# Altium PCB PCB1.PcbDoc
Units mil, origin at the board's own origin, x right, y up, seen from the top; angles counter-clockwise.
Board outline 3400 x 3300 mil, 2 copper layers (Top Layer, Bottom Layer); 26 components, 22 nets, 88 pads, 3 vias.
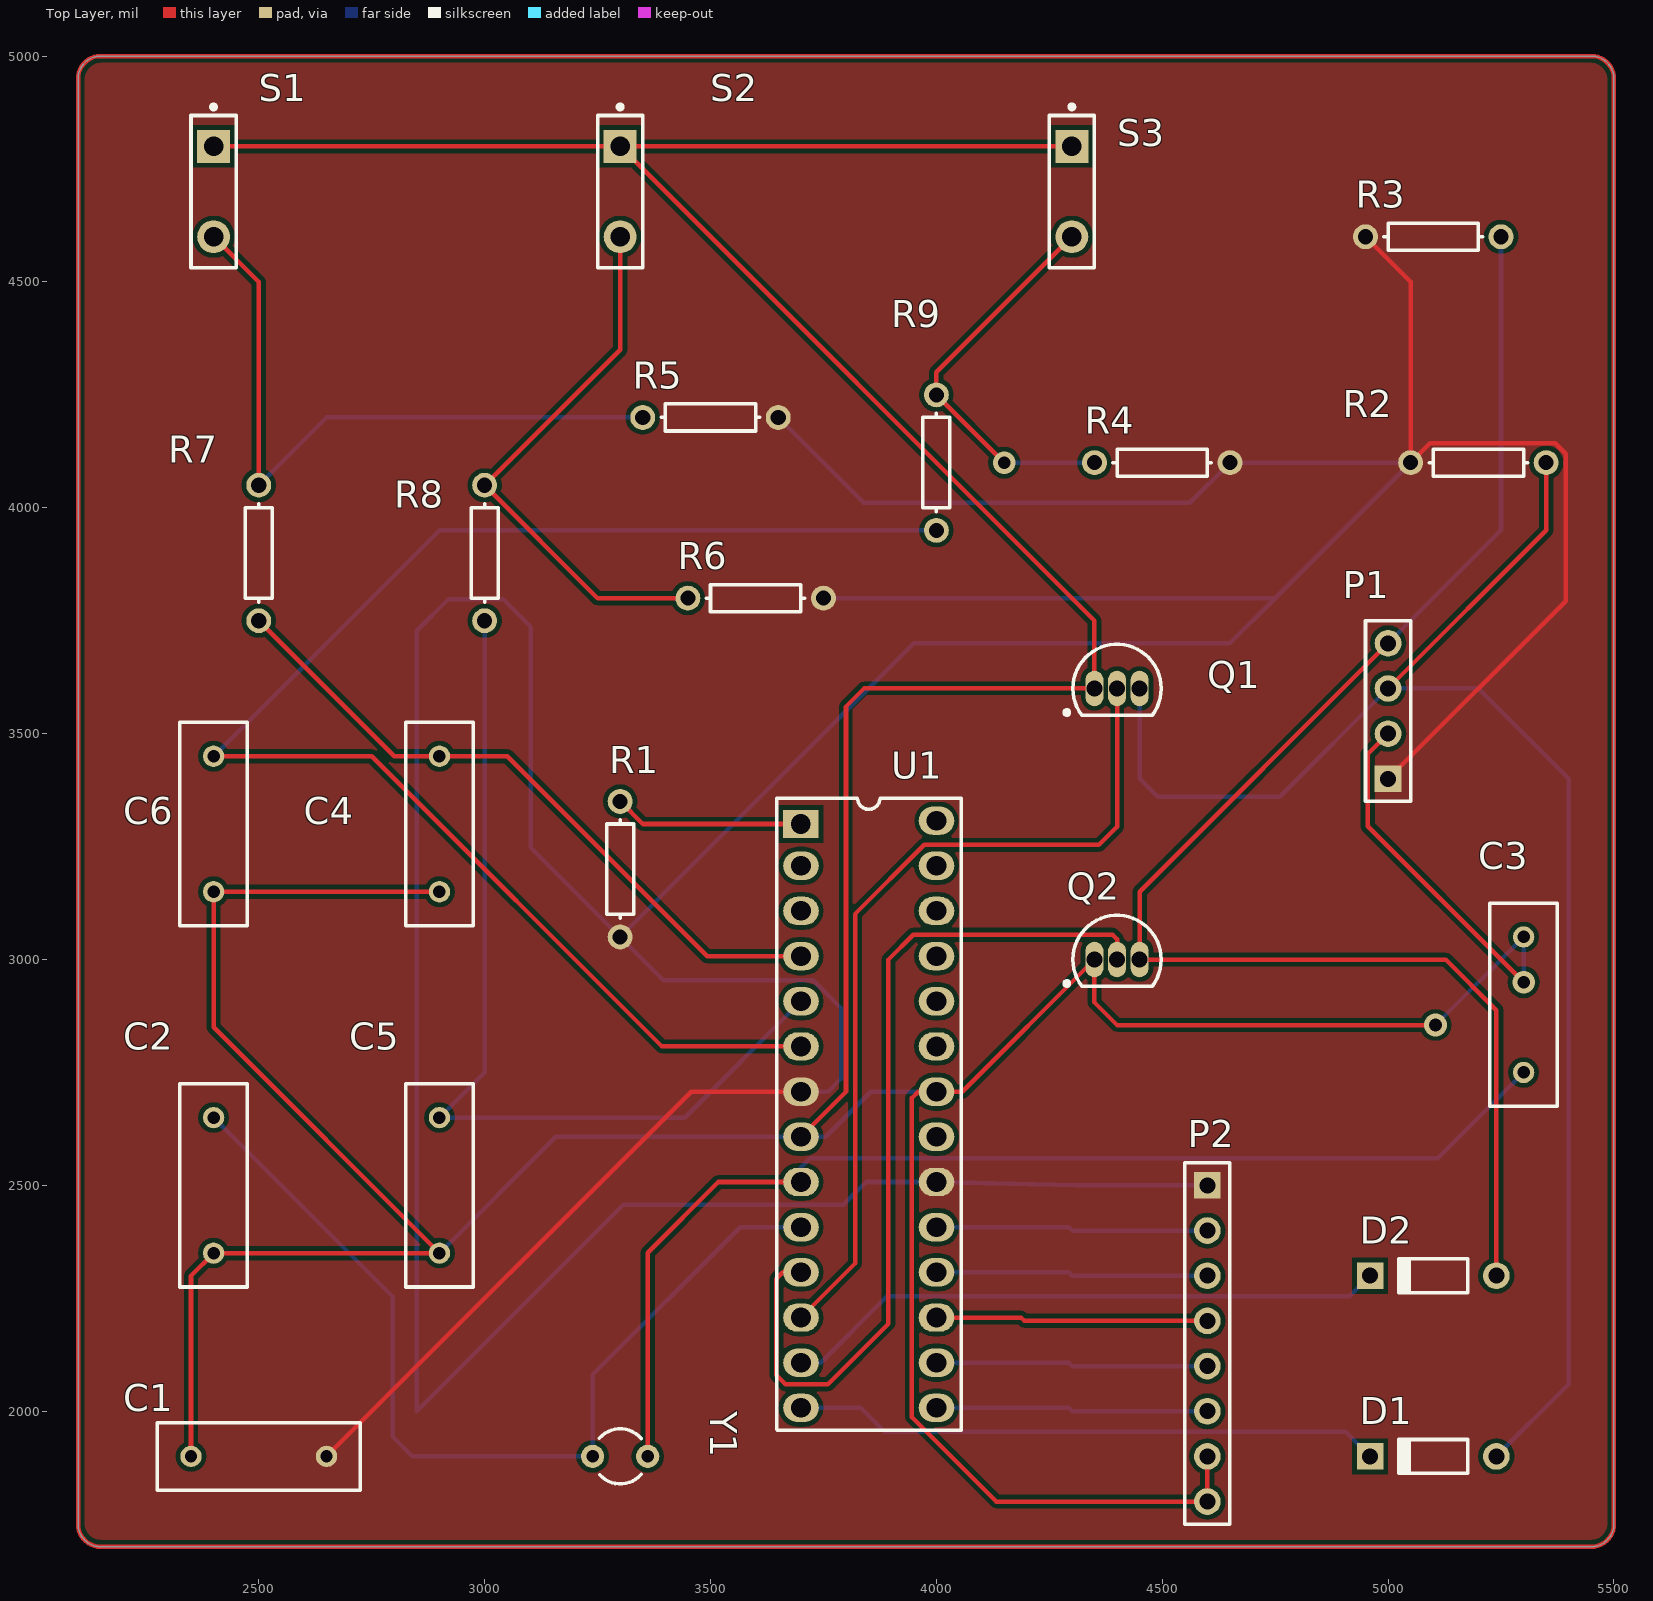
[diagram p0: Top Layer view]
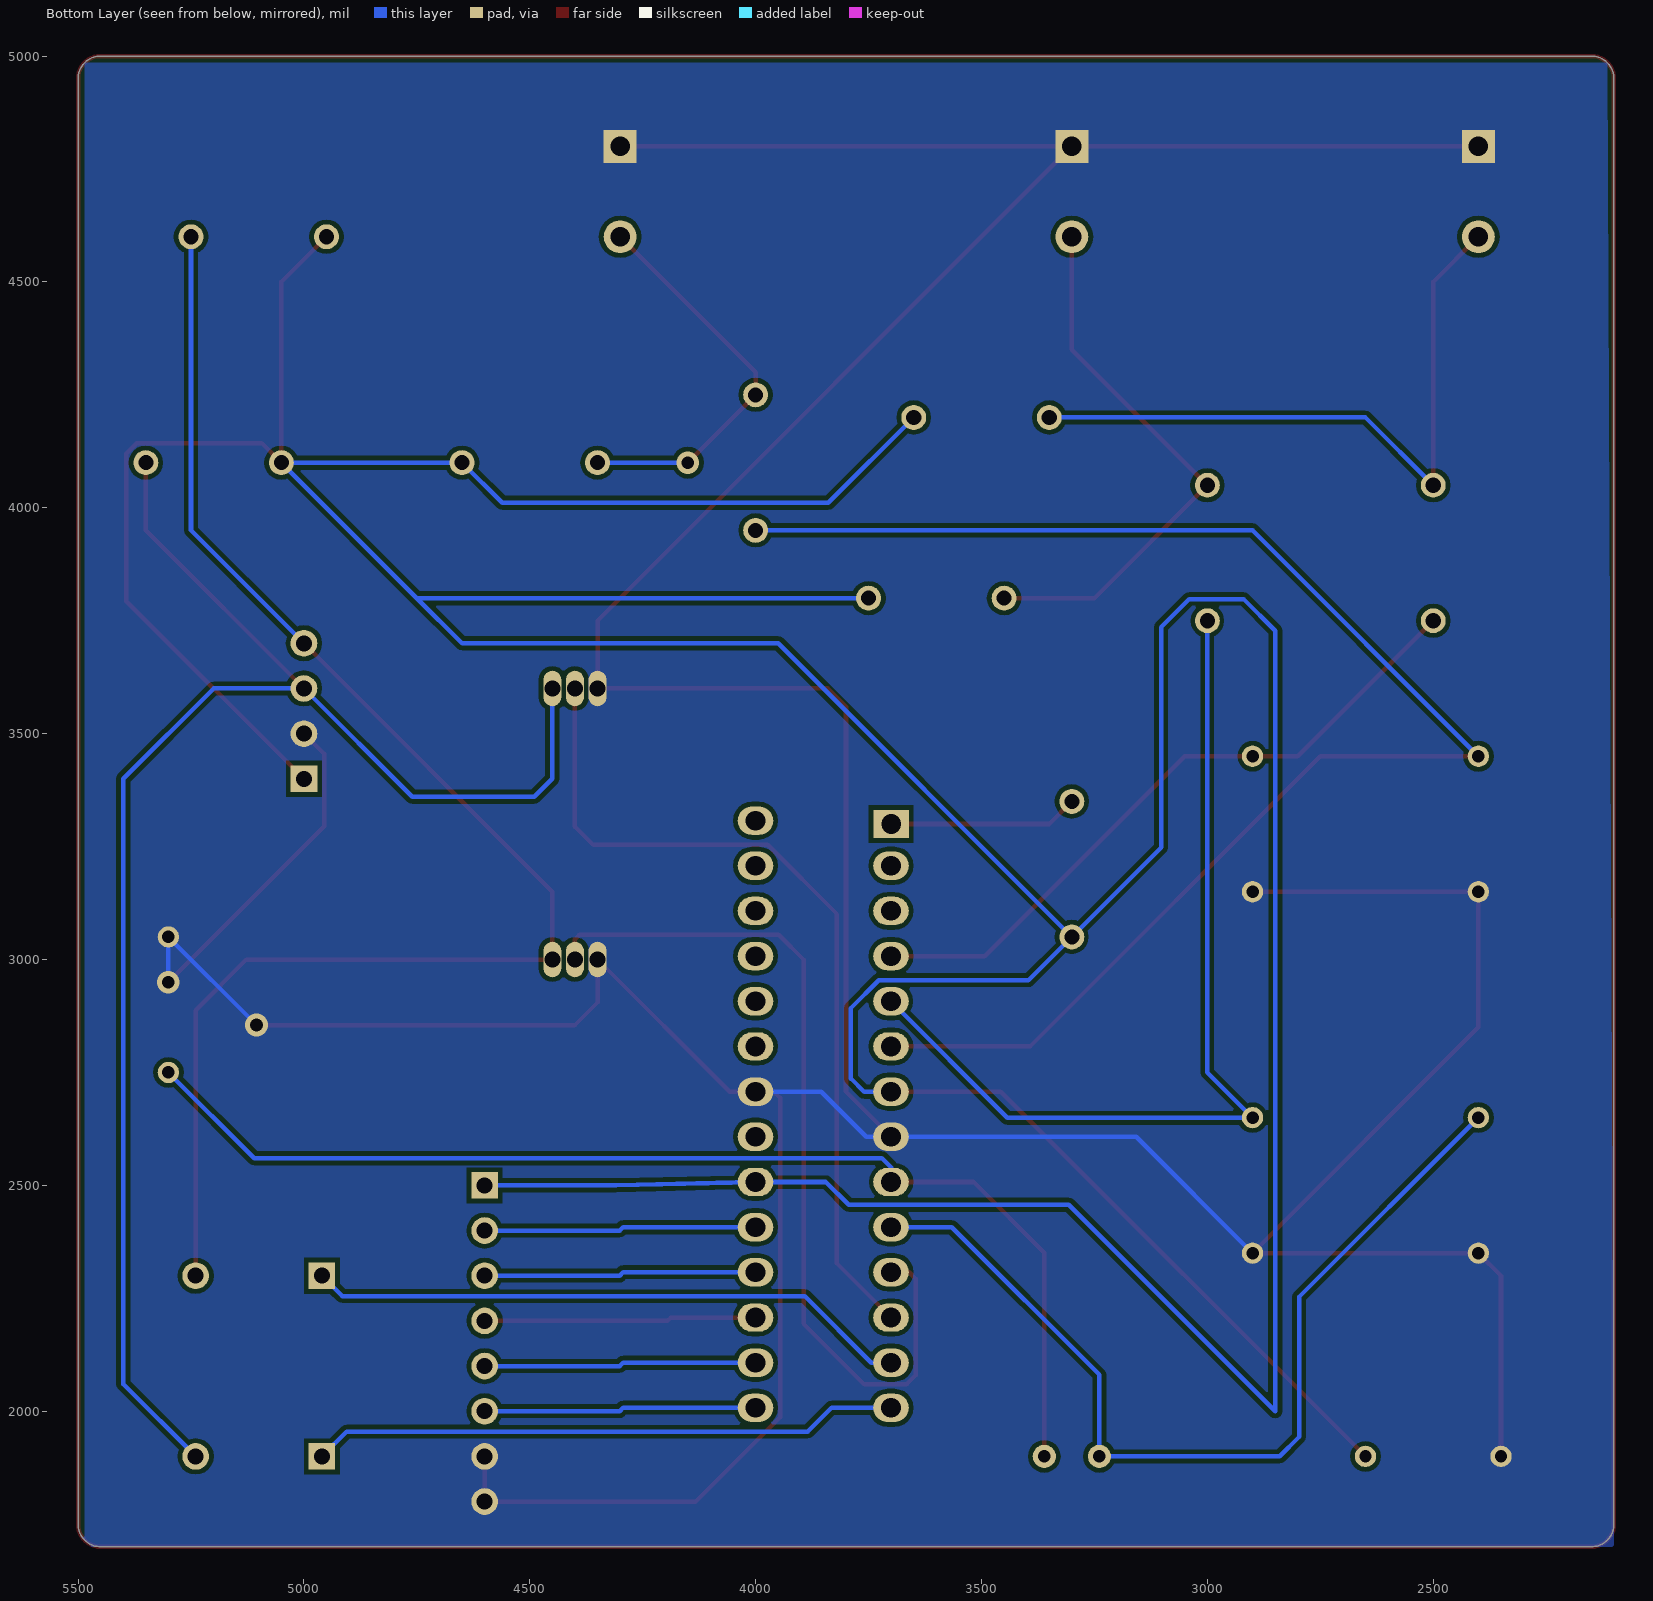
[diagram p1: Bottom Layer view, seen from below]

## Layer stack, top to bottom
Top Solder: solder mask 0.4, Solder Resist, Dk 3.5
Top Layer: signal copper 1.4
Dielectric 1: dielectric 12.6, FR-4, Dk 4.8
Bottom Layer: signal copper 1.4
Bottom Solder: solder mask 0.4, Solder Resist, Dk 3.5

## Board outline
2100,1750 2100,4950 cw(c2150,4950) 2150,5000 5450,5000 cw(c5450,4950) 5500,4950 5500,1750 cw(c5450,1750) 5450,1700 2150,1700 cw(c2150,1750)

## Design rules (kind name [scope] priority, off if disabled: settings)
Clearance Clearance_1 [All] p1: gap=10
Clearance [All] p2: gap=10
MinimumSolderMaskSliver [All] p1 off: minsoldermaskwidth=10
PlaneConnect [All] p1: planeconnectstyle=Direct reliefexpansion=20 reliefentries=4 reliefconductorwidth=10 reliefairgap=10
PolygonConnect [All] p1: connectstyle=Direct reliefconductorwidth=10 reliefentries=4 polygonreliefangle="90 Angle" airgapwidth=10
RoutingVias [All] p1: holewidth=28 width=50 viastyle="Through Hole" minholewidth=28 minwidth=50 maxholewidth=28 maxwidth=50
SilkToBoardRegionClearance [All] p1 off:
SilkToSilkClearance [All] p1 off: silktosilkclearance=10
SilkToSolderMaskClearance [IsPad] p1 off: minsilkscreentomaskgap=10 clearancetoexposedcopper=TRUE
SolderMaskExpansion [All] p1: expansion=4
Width [All] p1: maxlimit=10 minlimit=10 preferedwidth=10
25 further rules are at their usual default settings.

## Components (designator, comment, footprint, x,y, rotation, side; value= is the part's Value field where it differs from the comment)
C1 "Cap" RAD-0.3 2500,1900 r180 top
C2 "Cap" RAD-0.3 2400,2500 r90 top
C3 "Cap" RAD-0.3 5300,2900 r90 top
C4 "Cap" RAD-0.3 2900,3300 r90 top
C5 "Cap" RAD-0.3 2900,2500 r90 top
C6 "Cap" RAD-0.3 2400,3300 r90 top
D1 "Diode 1N914" DO-35 5100,1900 r180 top
D2 "Diode 1N914" DO-35 5100,2300 r180 top
P1 "Header 4" HDR1X4 5000,3400 r90 top
P2 "Header 8" HDR1X8 4600,2500 r270 top
Q1 "2N3904" TO-92A 4400,3600 r270 top
Q2 "2N3904" TO-92A 4400,3000 r270 top
R1 "Res1" AXIAL-0.3 3300,3200 r270 top
R2 "Res1" AXIAL-0.3 5200,4100 r180 top
R3 "Res1" AXIAL-0.3 5100,4600 r180 top
R4 "Res1" AXIAL-0.3 4500,4100 r0 top
R5 "Res1" AXIAL-0.3 3500,4200 r0 top
R6 "Res1" AXIAL-0.3 3600,3800 r0 top
R7 "Res1" AXIAL-0.3 2500,3900 r270 top
R8 "Res1" AXIAL-0.3 3000,3900 r270 top
R9 "Res1" AXIAL-0.3 4000,4100 r270 top
S1 "SW-PB" SPST-2 2400,4700 r270 top
S2 "SW-PB" SPST-2 3300,4700 r270 top
S3 "SW-PB" SPST-2 4300,4700 r270 top
U1 "ATMEGA328P-PU" 27_DIP_7.62mm 3700,3300 r0 top
Y1 "XTAL" R38 3300,1900 r90 top

## Footprints (in the part's own frame and the unit in brackets; to place one, negate y for a bottom-side part, rotate by r counter-clockwise, add the part's x,y. Pads: shape width x height; smd on the part's side, far side on the other; paste and mask are expansions set on the pad)
27_DIP_7.62mm [mm]
  rect 2x1.6 hole 1.1: 1(0,0)
  oval 2x1.6 hole 1.1: 2(0.01,-2.35) 3(0.01,-4.89) 4(0.01,-7.43) 5(0.01,-9.97) 6(0.01,-12.51) 7(0.01,-15.05) 8(0.01,-17.59) 9(0.01,-20.13) 10(0.01,-22.67) 11(0.01,-25.21) 12(0.01,-27.75) 13(0.01,-30.29) 14(0.01,-32.83) 15(7.63,-32.83) 16(7.63,-30.29) 17(7.63,-27.75) 18(7.63,-25.21) 19(7.63,-22.67) 20(7.63,-20.13) 21(7.63,-17.59) 22(7.63,-15.05) 23(7.63,-12.51) 24(7.63,-9.97) 25(7.63,-7.43) 26(7.63,-4.89) 27(7.63,-2.35) 28(7.63,0.19)
  silkscreen extent -1.35,-34.1 9.02,1.46, body extent -0.23,-34.26 7.65,1.68, height 4.65
AXIAL-0.3 [mm] "Axial Device, Thru-Hole; 2 Leads; 0.3 in Pin Spacing"
  round 1.4 hole 0.85: 1(-3.81,0) 2(3.81,0)
  silkscreen extent -2.77,-0.76 2.77,0.76
DO-35 [mm] "Diode, Axial; Body 3.8 x 1.9 mm (LxDia. max), Lead Dia. 0.53 mm (max)"
  round 1.5 hole 0.9: 1(-3.55,0)
  rect 1.5x1.5 hole 0.9: 2(3.55,0)
  silkscreen extent -1.95,-0.95 2.05,0.95
HDR1X4 [mm] "Connector; Header; 4 Position"
  rect 1.5x1.5 hole 0.9: 1(0,0)
  round 1.5 hole 0.9: 2(2.54,0) 3(5.08,0) 4(7.62,0)
  silkscreen extent -1.27,-1.27 8.89,1.27
HDR1X8 [mm] "Connector; Header; 8 Position"
  rect 1.5x1.5 hole 0.9: 1(0,0)
  round 1.5 hole 0.9: 2(2.54,0) 3(5.08,0) 4(7.62,0) 5(10.16,0) 6(12.7,0) 7(15.24,0) 8(17.78,0)
  silkscreen extent -1.27,-1.27 19.05,1.27
R38 [mm] "Crystal, Thru-Hole; 2 Leads; Body 3.1 x 8.2 mm (Dia.xH)"
  round 1.3 hole 0.7: 1(0,1.55) 2(0,-1.55)
  silkscreen extent -1.55,-1.19 1.55,1.17
RAD-0.3 [mm] "Radial Cap, Thru-Hole; 2 Leads; 0.3 in Pin Spacing"
  round 1.2 hole 0.7: 1(-3.81,0) 2(3.81,0)
  silkscreen extent -5.71,-1.91 5.71,1.91
SPST-2 [mm] "Switch; 2 Leads"
  rect 1.85x1.85 hole 1.1: 1(-2.54,0)
  round 1.85 hole 1.1: 2(2.54,0)
  silkscreen extent -4.89,-1.27 4.28,1.27
TO-92A [mm] "TO, Flat Index; 3 In-Line, Axial Leads; Body Dia. 4.5mm; Leads 0.51 x 0.48 mm (max)"
  oval 2x1 hole 0.9: 1(0,-1.27) 2(0,0) 3(0,1.27)
  silkscreen extent -2.48,-2.95 1.5,2.48, body extent -2.5,-2.5 1.5,2.5, height 6.86

## Part data
C1 C2 C3 C4 C5 C6: "Capacitor"
D1 D2: "High Conductance Fast Diode"
P1: "Header, 4-Pin"
P2: "Header, 8-Pin"
Q1 Q2: "NPN General Purpose Amplifier"
R1 R2 R3 R4 R5 R6 R7 R8 R9: "Resistor"
S1 S2 S3: "Switch"
U1: "ATMEGA328P-PU; 8 bit Microcontroller AVR 20MHz 1; 32kb Flash; 2kb RAM; I2C SPI 2"
Y1: "Crystal Oscillator"

## Via types
v1: diameter 50, hole 28, Top Layer to Bottom Layer, 3 vias

## Nets (pads, with @x,y where several pads share a name; then routed paths per layer and width w, separated by ;. In a path a pad name is that pad's centre, name@x,y a point inside that pad or via, vN(x,y) a via of type N, cw(c..) or ccw(c..) an arc to the next point about the centre after c; other vN are vias at no path point)
GND: C1.2 C2.1 C3.2 C4.1 C5.1 C6.1 P1.2 P2.7 P2.8 Q1.1 Q2.1 S1.1 S2.1 S3.1 U1.8 U1.22 | length 12848.5
  Top Layer w10: C1.2 2350,2300 C2.1 C5.1 2400,2850 C6.1 C4.1 ; S1.1 S2.1 ; U1.8 3800,2707.09 3800,3560 3840,3600 Q1.1 4350,3750 S2.1 ; S3.1 S2.1 ; P2.7 P2.8 4133,1800 3946,1987 3946,2693.48 3960,2707.48 U1.22 4057.48,2707.48 Q2.1 4350,2905 4400,2855 v1(5105,2855) ; P1.2 4955,3455 4955,3295 v1(5300,2950)
  Bottom Layer w10: C5.1 3157.48,2607.48 U1.8 3755,2607.48 3855,2707.48 U1.22 ; v1(5105,2855) C3.2 v1(5300,2950)
MISO: P2.3 U1.18 | length 602.7
  Bottom Layer w10: U1.18 4293.52,2307.48 4301,2300 P2.3
MOSI: P2.4 U1.17 | length 602.7
  Top Layer w10: U1.17 4187.52,2207.48 4195,2200 P2.4
MOTION: P2.6 U1.15 | length 602.7
  Bottom Layer w10: U1.15 4293.52,2007.48 4301,2000 P2.6
NetC2_2: C2.2 U1.10 Y1.1 | length 2108.6
  Bottom Layer w10: C2.2 2797,2253 2797,1943 2840,1900 Y1.1 3238.98,2080.46 3566,2407.48 U1.10
NetC3_1: C3.1 U1.9 Y1.2 | length 2574.3
  Top Layer w10: Y1.2 3361.02,2351.02 3517.48,2507.48 U1.9
  Bottom Layer w10: U1.9 3700.39,2540 3720.39,2560 5110,2560 C3.1
NetC4_2: C4.2 R7.2 U1.4 | length 1508
  Top Layer w10: R7.2 2800,3450 C4.2 3050,3450 3492.52,3007.48 U1.4
NetC5_2: C5.2 R8.2 U1.5 | length 2048.5
  Bottom Layer w10: R8.2 3000,2750 C5.2 3442.91,2650 U1.5
NetC6_2: C6.2 R9.2 U1.6 | length 3373.6
  Top Layer w10: C6.2 2750,3450 3392.52,2807.48 U1.6
  Bottom Layer w10: C6.2 2900,3950 R9.2
NetD1_1: D1.1 P1.3 Q1.3 R2.1 | length 3560.2
  Top Layer w10: P1.3 5350,3950 R2.1
  Bottom Layer w10: Q1.3 4450,3400 4490,3360 4760,3360 P1.3 5200,3600 5400,3400 5400,2060.24 D1.1
NetD1_2: D1.2 U1.14 | length 1304.4
  Bottom Layer w10: U1.14 3832,2007.48 3884.48,1955 4905.24,1955 D1.2
NetD2_1: D2.1 P1.4 Q2.3 R3.1 | length 3355.5
  Top Layer w10: P1.4 4450,3150 Q2.3 5127.76,3000 5239.76,2888 D2.1
  Bottom Layer w10: P1.4 5250,3950 R3.1
NetD2_2: D2.2 U1.13 | length 1339.6
  Bottom Layer w10: U1.13 3744,2107.48 3891.52,2255 4915.24,2255 D2.2
NetQ1_2: Q1.2 U1.12 | length 1908.9
  Top Layer w10: U1.12 3820,2327.09 3820,3100.72 3973.26,3253.98 4360,3253.98 4400,3293.98 Q1.2
NetQ2_2: Q2.2 U1.11 | length 1969.4
  Top Layer w10: U1.11 3660,2307.48 3646,2293.48 3646,2080 3666,2060 3760,2060 3894,2194 3894,3000 3949,3055 4390,3055 4400,3045 Q2.2
NetR1_1: R1.1 U1.1 | length 420.7
  Top Layer w10: R1.1 3350,3300 U1.1
NetR4_1: R4.1 R9.1 S3.2 | length 886.4
  Top Layer w10: v1(4150,4100) R9.1 4000,4300 S3.2
  Bottom Layer w10: v1(4150,4100) R4.1
NetR5_1: R5.1 R7.1 S1.2 | length 1503.6
  Top Layer w10: S1.2 2500,4500 R7.1
  Bottom Layer w10: R7.1 2650,4200 R5.1
NetR6_1: R6.1 R8.1 S2.2 | length 1227.8
  Top Layer w10: S2.2 3300,4350 R8.1 3250,3800 R6.1
SPICLK: P2.2 U1.19 | length 602.7
  Bottom Layer w10: U1.19 4293.52,2407.48 4301,2400 P2.2
SS: P2.5 U1.16 | length 602.7
  Bottom Layer w10: U1.16 4293.52,2107.48 4301,2100 P2.5
VCC: C1.1 P1.1 P2.1 R1.2 R2.2 R3.2 R4.2 R5.2 R6.2 U1.7 U1.20 | length 13453.3
  Top Layer w10: C1.1 3457.48,2707.48 U1.7 ; R3.2 5050,4500 R2.2 5093,4143 5370,4143 5393,4120 5393,3793 P1.1
  Bottom Layer w10: R5.2 3839,4011 4561,4011 R4.2 R2.2 4750,3800 ; U1.7 3760,2707.48 3788.98,2736.46 3788.98,2892.52 3727.53,2953.98 3396.02,2953.98 R1.2 ; R6.2 4750,3800 ; P2.1 4308.48,2500 U1.20 3844.48,2507.48 3794,2457 3307,2457 2850,2000 2850,3728 2920,3798 3040,3798 3102,3736 3102,3248 R1.2 ; R1.2 3950,3700 4650,3700 4750,3800
pads on no net: U1.2 U1.3 U1.21 U1.23 U1.24 U1.25 U1.26 U1.27 U1.28
copper on no net: | length 13314.2
  Top Layer w10: 2100,1750 ccw(c2150,1750) 2150,1700 5450,1700 ccw(c5450,1750) 5500,1750 5500,4950 ccw(c5450,4950) 5450,5000 2500,5000 2150,5000 ccw(c2150,4950) 2100,4950 2100,1750

## Polygon pours and split planes (outlines as drawn)
GND on Bottom Layer "Bottom Layer Ground" (solid, pour order 10): 2114.34,4985.66 5485.66,4985.66 5485.66,1723.57 5489.67,1719.56 5470.11,1700 2100,1700
VCC on Top Layer "Top Layer VCC" (solid, pour order 12): 2114.34,4985.66 5476.43,4985.66 5480.44,4989.67 5485.66,4984.45 5485.66,1714.34 2116.77,1714.34 2106.32,1724.78